# Altium PCB ESP32_USB-C.PcbDoc (part 2 of 3)
Units mil, origin at the board's own origin, x right, y up, seen from the top; angles counter-clockwise.
Board outline 2697 x 1000 mil, 4 copper layers (L1, L2, L3, L4), stack 61.583 mil thick; 64 components, 73 nets, 299 pads, 171 vias.
Unrouted connection lines stored in the file: 5.
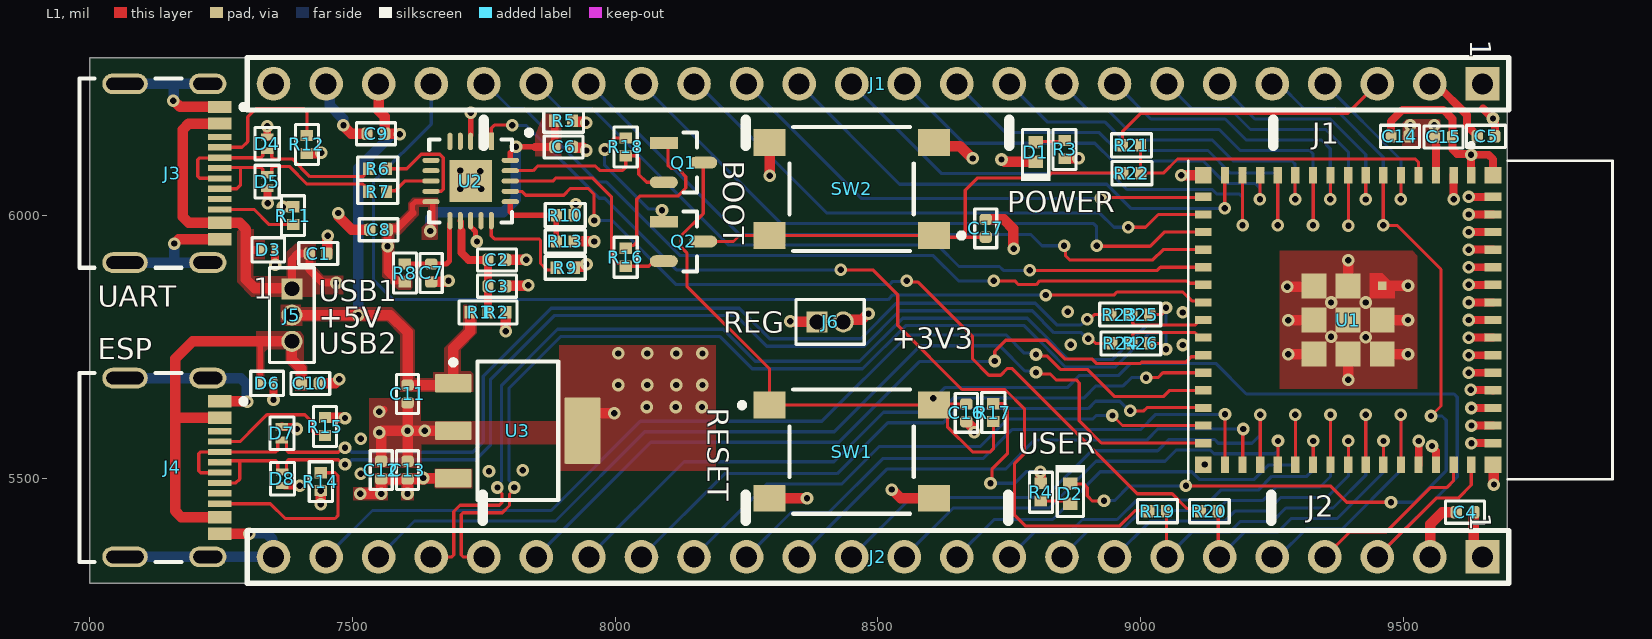
[diagram p0: L1 view]

## Part data (continued)
U3: "IC REG LINEAR 3.3V 1.5A SOT223-4", Case/Package=SOP, Dropout Voltage1-Max=550mV, Dropout Voltage1-Nom=340mV, Input Voltage Absolute-Max=20V, LCSC Part Number=C181262, Manufacturer="Texas Instruments", Min Input Voltage=3.8V, Operating Temperature, TJ-Max=125°C, Operating Temperature, TJ-Min=-40°C, Output Current1-Max=1.5A, Output Voltage1-Max=3.4V, Output Voltage1-Min=3.2V, Output Voltage1-Nom=3.3V, Package Body Material=Plastic, Package Shape=Rectangular, Package Style="SMALL OUTLINEMeter", Peak Reflow Temperature (Cel)=260°C, Supplier Part Number=296-24897-1-ND, Voltage Tolerance-Max=3%, Adjustability=FIXED, Category="Voltage Regulators - Linear", Channels=1, ComponentLink1Description=https://www.ti.com:443/lit/ds/symlink/tl1963a.pdf?src-supplier=IHS+Markit, ComponentLink1URL=https://www.ti.com:443/lit/ds/symlink/tl1963a.pdf?src-supplier=IHS+Markit, ComponentLink2Description=https://datasheet.ciiva.com/2046/-2046068.pdf?src-supplier=Digikey, ComponentLink2URL=https://datasheet.ciiva.com/2046/-2046068.pdf?src-supplier=Digikey, Height - Seated (Max)=1.8mm, JESD-30 Code=R-PDSO-G4, JESD-609 Code=e3, Length=6.5mm, Line Regulation-Max=0.01%, Load Regulation-Max=0.07%, Manufacturer Part Number=TL1963A-33DCYR, Max Supply Voltage=20V, Moisture Sensitivity Level=2, Number of Outputs=1, Packaging="Tape and Reel", Pins=4, Pricing="1=2.91, 10=2.614, 25=2.4712, 100=2.1417, 250=2.03188, 500=1.8232, 1000=1.53764 (USD)", Qualification Status="Not Qualified", Reach SVHC Compliant=Yes, Regulator Type="FIXED POSITIVE SINGLE OUTPUT LDO REGULATOR", RoHS=Yes, RoHS Compliant=Yes, Stock=4105, Supplier=Digikey, Surface Mount=Yes, Technology=BIPOLAR, Terminal Finish=Tin, Terminal Form="Gull Wing", Terminal Pitch=2.3mm, Terminal Position=DUAL, Width=3.5mm

## Via types
v1: diameter 24, hole 12, L1 to L4, tented both sides, 170 vias
v2: diameter 24, hole 12, L1 to L4, 1 vias

## Nets (pads, with @x,y where several pads share a name; then routed paths per layer and width w, separated by ;. In a path a pad name is that pad's centre, name@x,y a point inside that pad or via, vN(x,y) a via of type N, cw(c..) or ccw(c..) an arc to the next point about the centre after c; other vN are vias at no path point)
+3V3: C4.2 C5.2 C14.2 C15.2 J1.2 J2.1 J6.2 R2.1 R3.2 R4.2 R5.1 R17.2 U1.3 | length 5041.3
  L1 w6: v1(8714,5490) 8716.68,5492.68 8716.68,5516.47 8746.14,5545.93 8746.14,5635.51 8740.28,5641.37 R17.2@8719.33,5641.37
  L1 w15: C14.2@9510,6150 9511.35,6151.35 9511.35,6169.65 v1(9512.69,6171) ; J1.2@9550,6250 9561.25,6250 9620.42,6190.83 9620.42,6170.76 9636.87,6154.31 9636.87,6153.13 C5.2@9640,6150 ; v1(9558,6171) 9558.5,6170.49 9558.5,6149.38 9561.36,6146.52 9561.36,6076.55 U1.3@9561.73,6076.18
  L1 w20: v1(7792,5779) R2.1@7792.01,5815 ; R5.1@7919.02,6179.92 7919.02,6178.74 7919.65,6178.11 7941.81,6178.11 7943.92,6176 v1(7945,6176) ; J6.2@8434,5797 8437.83,5800.83 8469.41,5800.83 8480.92,5812.34 v1(8482,5812.34) ; v1(8809,5512.14) 8809.5,5511.64 8809.5,5490.51 R4.2@8810,5490.01 ; R3.2@8855,6107.99 8855.5,6108.5 v1(8881.5,6108.5) ; C4.2@9633.86,5435 9633.86,5366.14 J2.1@9650,5350
  L2 w20: v1(7792,5779) 7865.26,5852.26 7936.26,5852.26 8024,5940 ; v1@7944.23,6176.77 v1(7945,6176) 8024,6176 ; v1(8714,5490) 8679,5490 8482,5687 v1(8482,5812.34) 8482,5901.5 8600.5,6020 8869.78,6020 8881.5,6031.72 v1(8881.5,6108.5) ; 8821.5,6108.5 v1(8881.5,6108.5) ; 8947.65,6171 8893.21,6171 8881.5,6159.28 v1(8881.5,6108.5) ; v1(9558,6171) 9558,5822.96 9586,5794.96 9586,5503 9650,5439 J2.1@9650,5350
  L2 w30: 8947.65,6171 v1(9512.69,6171) v1(9558,6171) ; J1.2@9550,6250 9554.5,6245.5 v1@9554.5,6174.5
  L2 w40: 8024,5940 8024,6176 8754,6176 8821.5,6108.5
  L4 w6: v1(8714,5490) 8760,5490 8782.14,5512.14 v1(8809,5512.14)
+3V3_FTDI: C6.2 C8.2 R5.2 R8.1 U2.10 U2.20 | length 749.9
  L1 w10.01: 7614.17,6003.94 7614.17,6019.76 7620.04,6025.63 7652.77,6025.63 7652.77,5978.55 7648,5973.79 v1(7648,5970) ; U2.20@7800.41,6104.6 7800.41,6119.14 v1(7811.28,6130) 7847.34,6130 7847.42,6129.92
  L1 w15: v1(7567,5941) C8.2@7566.97,5972.25 ; C8.2@7566.93,5973.46 7568.43,5974.97 7585.21,5974.97 7614.17,6003.94 ; v1(7567,5941) 7566.93,5940.93 7566.93,5892.89 7583.7,5876.12 7596.87,5876.12 R8.1@7600,5872.99 ; 7847.42,6129.92 7884.92,6129.92 7885,6130 R5.2@7885,6178.74
  L4 w20: v1(7648,5970) 7648,5994.28 7659.72,6006 7787.28,6006 7811.28,6029.99 v1(7811.28,6130)
+3V3_REG: C12.2 C13.2 J6.1 U3.3 | length 1110.3
  L1 w20: v1(7515,5470) v1(7555,5470) C12.2@7555,5498.07 C13.2@7605,5498.07 ; v1(7605,5470) C13.2@7605,5498.07 ; U3.3@7691.97,5499.45 7691.69,5499.72 7635.28,5499.72 v1(7635,5500) 7633.92,5500 7632.62,5498.7 7605.63,5498.7 C13.2@7605,5498.07 ; v1(8333,5798) 8333.5,5797.5 8383.5,5797.5 J6.1@8384,5797
  L2 w40: v1(7635,5500) 7664,5500 7688,5524 ; 8277,5802 8281,5798 v1(8333,5798)
  L2 w60: 7688,5524 7966,5802 8277,5802
+5V: C9.2 C11.2 J1.22 J5.2 R1.1 U3.1 | length 1083.1
  L1 w20: J5.2@7385,5810 7572,5810 7605,5777 C11.2@7605,5676.93 7688.35,5676.93 U3.1@7691.97,5680.55 7691.97,5746.97 7723.98,5778.98 R1.1@7723.98,5815 ; J1.22@7550,6250 7550,6198.85 7561.93,6186.92 C9.2@7561.93,6155 7562.43,6154.5 7589.5,6154.5 v1(7590,6154)
  L4 w20: v1(7511.4,5810) 7511.4,6089.4 7575.23,6153.23 7589.23,6153.23 v1(7590,6154)
+5V_VBUS1: C1.2 D3.2 J3.A4B9 J3.B4A9 J5.1 R10.2 | length 1422.1
  L1 w15: 7297.05,5934.05 7297.09,5934 D3.2@7327.2,5934 ; J5.1@7385,5860 7384.85,5860.15 7384.85,5915.26 7396.6,5927 C1.2@7418.14,5927 7418.14,5896.86 7443,5872 7468,5872 v1(7469,5871) ; R10.2@7922.01,6000 7923.5,6001.5 7923.5,6019.5 v1(7925,6021)
  L1 w20: J3.A4B9@7247.64,6174.41 7188.72,6174.41 7177,6162.69 7177,5997.15 7188.72,5985.43 J3.B4A9@7247.64,5985.43 7285.33,5985.43 7297.05,5973.72 7297.05,5934.05 7297.05,5878.15 7313.98,5861.22 7383.78,5861.22 J5.1@7384.85,5860.15
  L2 w20: v1(7469,5871) 7579.04,5871 7634.04,5816 7743,5816 7789,5862 7789,5963 7847,6021 v1(7925,6021)
+5V_VBUS2: C10.2 D6.2 J4.A4B9 J4.B4A9 J5.3 | length 856.9
  L1 w10.01: D6.2@7325,5680 7325,5760.07
  L1 w20: 7173.15,5614.57 7214,5614.57 J4.A4B9@7247.64,5614.57 ; J4.B4A9@7247.64,5425.59 7214,5425.59 7174.72,5425.59 7163,5437.31 7163,5613 7163,5727 7196.07,5760.07 7325,5760.07 J5.3@7384.93,5760.07 ; J5.3@7385,5760 7385,5726 7403.07,5707.93 C10.2@7403.07,5680
+VCC_FTDI: C2.2 C3.2 R1.2 R2.2 U2.12 | length 212.1
  L1 w10.01: U2.12@7705.32,5989.59 7707.48,5987.42 7707.48,5970
  L1 w15: 7707.48,5970 7707.48,5928.52 7720.94,5915.06 ; 7727,5915 C2.2@7758.07,5915 C3.2@7758.07,5865 ; R2.2@7757.99,5815 C3.2@7757.99,5865
BTN_GPIO0: C17.2 Q2.3 R22.1 SW2.1 SW2.2 | length 926
  L1 w6: Q2.3@8188,5950 8225,5950 8236.42,5961.42 SW2.2@8293.5,5961.42 SW2.1@8606.5,5961.42 8609.84,5958.07 8666,5958.07 ; C17.2@8705,5958.07 8666,5958.07 ; R22.1@8965.98,6080 8829.42,6080 8820.42,6071 8689.48,6071 8666,6047.52 8666,5958.07
CHIP_PU: C16.2 J2.3 Q1.3 R17.1 SW1.1 SW1.2 U1.45 | length 2854.7
  L1 w6: Q1.3@8167.42,6100 8167.42,6003.06 8125.71,5961.34 8125.71,5939.12 8136.52,5928.31 8136.52,5864.92 8293.5,5707.94 SW1.1@8293.5,5638.58 SW1.2@8606.5,5638.58 SW1.2@8611.42,5638.58 ; v1(8605,5652) 8609.29,5647.71 SW1.2@8620.54,5647.71 ; C16.2@8668,5640.93 8632.01,5640.93 8631.32,5640.24 8631.32,5636.93 SW1.2@8620.54,5647.71 ; R17.1@8719.33,5607.35 8719.49,5607.19 8719.49,5555.35 8713.63,5549.49 8679.97,5549.49 8632.01,5597.45 8632.01,5617.99 SW1.2@8611.42,5638.58 ; J2.3@9450,5350 9561.81,5461.81 9603.81,5461.81 9628.66,5486.66 U1.45@9628.66,5525 ; SW1.2@8611.42,5638.58 SW1.2@8620.54,5647.71
  L4 w6: v1(8605,5652) 8607.18,5652 8627.18,5672 8860.18,5672 8883.37,5695.19 8958.09,5695.19 8980.91,5718 9142.48,5718 9200.75,5659.73 9596.14,5659.73 9602,5653.87 9602,5502 J2.3@9450,5350
CON1_USB_N: D4.2 J3.A7 J3.B7 R6.1 | length 444.9
  L1 w6.23: J3.A7@7247.64,6070.08 7209.65,6070.08 7206,6073.73 7206,6105.35 7209.65,6109 7247.19,6109 J3.B7@7247.64,6109.45 7283,6109.45 7325.65,6109.45 7329.3,6113.1 7329.3,6119.23 7333.08,6123 7342.92,6123 7346.7,6119.23 7346.7,6110.66 7350.35,6107.01 7385.84,6107.01 7419.3,6073.55 7520.06,6073.55 7523.71,6077.2 7523.71,6081.07 R6.1@7531.22,6088.58
CON1_USB_P: D5.2 J3.A6 J3.B6 R7.1 | length 403.6
  L1 w6.23: J3.B6@7247.64,6050.39 7280.39,6050.39 7287,6057 7287,6090.82 ; J3.A6@7247.64,6089.76 7248.7,6090.82 7287,6090.82 ; R7.1@7531.22,6044.29 7523.71,6051.81 7523.71,6055.67 7520.06,6059.32 7413.41,6059.32 7379.94,6092.78 7350.35,6092.78 7346.7,6089.13 7346.7,6080.57 7342.92,6076.8 D5.2@7338,6076.8 7333.08,6076.8 7329.3,6080.57 7329.3,6087.17 7325.65,6090.82 7287,6090.82
CON2_USB_N: D7.2 J4.A7 J4.B7 R23.1 | length 2118.4
  L1 w6.23: J4.A7@7247.64,5510.24 7211.65,5510.24 7208,5513.89 7208,5545.96 7211.65,5549.61 J4.B7@7247.64,5549.61 7354.65,5549.61 7358.3,5553.26 7358.3,5568.35 7362.08,5572.13 D7.2@7366,5572.13 7370.92,5572.13 7374.7,5568.35 7374.7,5552.65 7378.35,5549 7473.47,5549 7482.32,5557.85 v1(7486,5557.85) ; v1(8898,5802) 8902.81,5802 8911.81,5811 R23.1@8942.98,5811
  L4 w6.23: v1(7486,5557.85) 7489.65,5557.85 7498.53,5548.97 7728.97,5548.97 7748.77,5568.77 7748.77,5693.89 7878.11,5823.23 8235.89,5823.23 8294.15,5764.97 8467.65,5764.97 8535.03,5832.35 8799.31,5832.35 8840.66,5791 8885.47,5791 8896.47,5802 v1(8898,5802)
CON2_USB_P: D8.2 J4.A6 J4.B6 R24.1 | length 2082.8
  L1 w6.23: J4.B6@7247.64,5490.55 7278.55,5490.55 7286,5498 7286,5531.42 7284.71,5532.71 ; J4.A6@7247.64,5529.92 7250.43,5532.71 7284.71,5532.71 ; v1(7486,5525.86) 7482.37,5525.86 7473.47,5534.77 7378.35,5534.77 7374.7,5531.12 7374.7,5515.37 7370.92,5511.59 D8.2@7367,5511.59 7362.08,5511.59 7358.3,5515.37 7358.3,5529.06 7354.65,5532.71 7284.71,5532.71 ; v1(8900.01,5765) 8904.82,5765 8913.82,5756 R24.1@8944.99,5756
  L4 w6.23: v1(7486,5525.86) 7489.65,5525.86 7498.53,5534.74 7734.87,5534.74 7763,5562.88 7763,5688 7884,5809 8230,5809 8288.26,5750.74 8473.54,5750.74 8540.92,5818.12 8793.41,5818.12 8834.76,5776.77 8886.77,5776.77 8898.54,5765 v1(8900.01,5765)
CON_ESP_USB_N: J2.21 R25.1 | length 1957
  L1 w6.03: J2.21@7650,5350 7689.45,5350 7692.98,5353.53 7692.98,5436.28 7704.74,5448.03 7779.44,5448.03 7784.99,5453.58 7784.99,5469.48 7776.01,5478.46 v1(7776.01,5482) ; R25.1@9017,5811 9040,5811 9048,5819 v1(9048,5824)
  L4 w6.03: v1@7772.08,5478.07 v1@7772.08,5480.59 ; v1(7776.01,5482) 7776.01,5486.53 7784,5494.52 7784,5676.84 7890.19,5783.03 8205.5,5783.03 8266.5,5722.03 8464.8,5722.03 8546.77,5804 8784.02,5804 8837.67,5750.34 8837.67,5749.9 8862.35,5725.23 8945.65,5725.23 9010.94,5790.52 9044.47,5790.52 9048,5794.05 v1(9048,5824)